# Altium PCB PID.PcbDoc
Units mil, origin at the board's own origin, x right, y up, seen from the top; angles counter-clockwise.
Board outline 2435 x 1955 mil, 2 copper layers (Top Layer, Bottom Layer); 19 components, 15 nets, 54 pads, 0 vias.
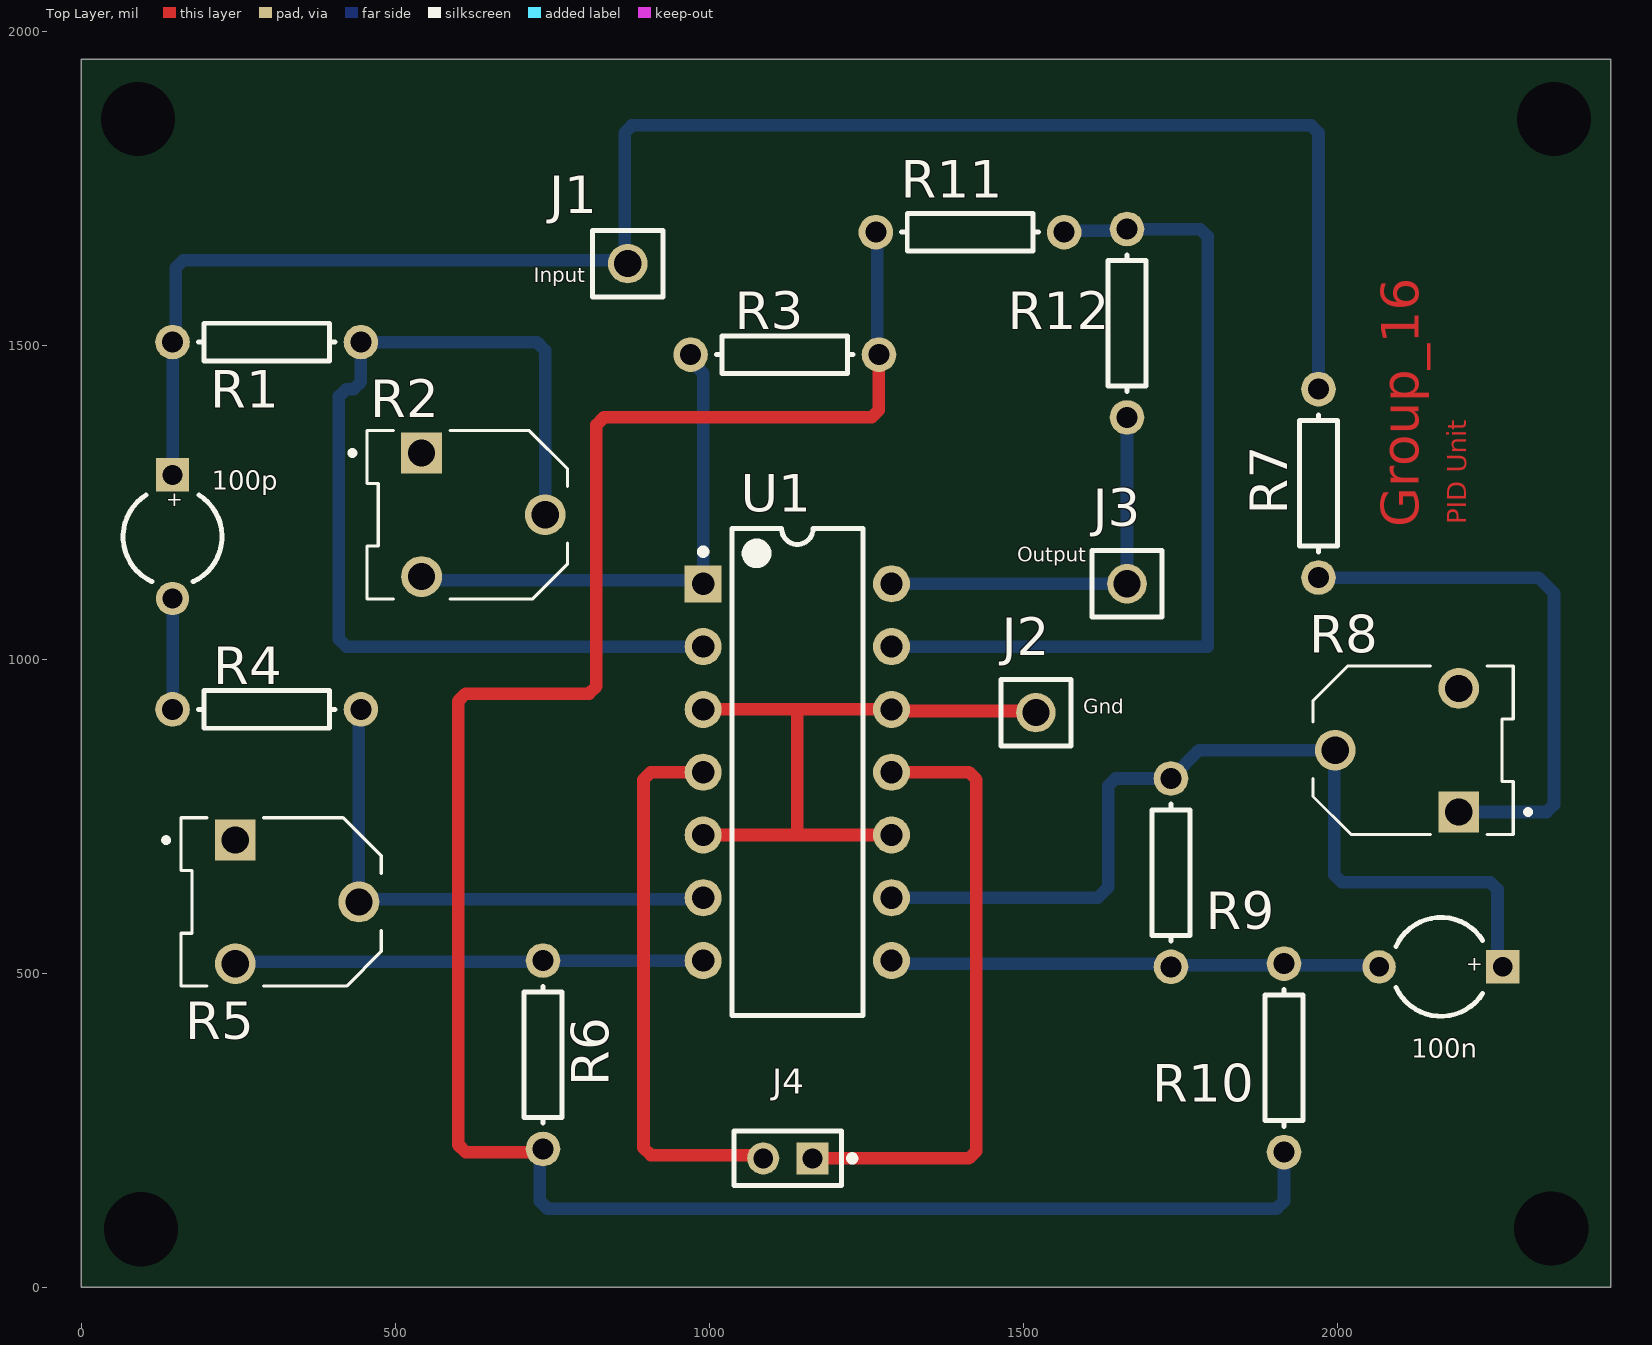
[diagram p0: Top Layer view]
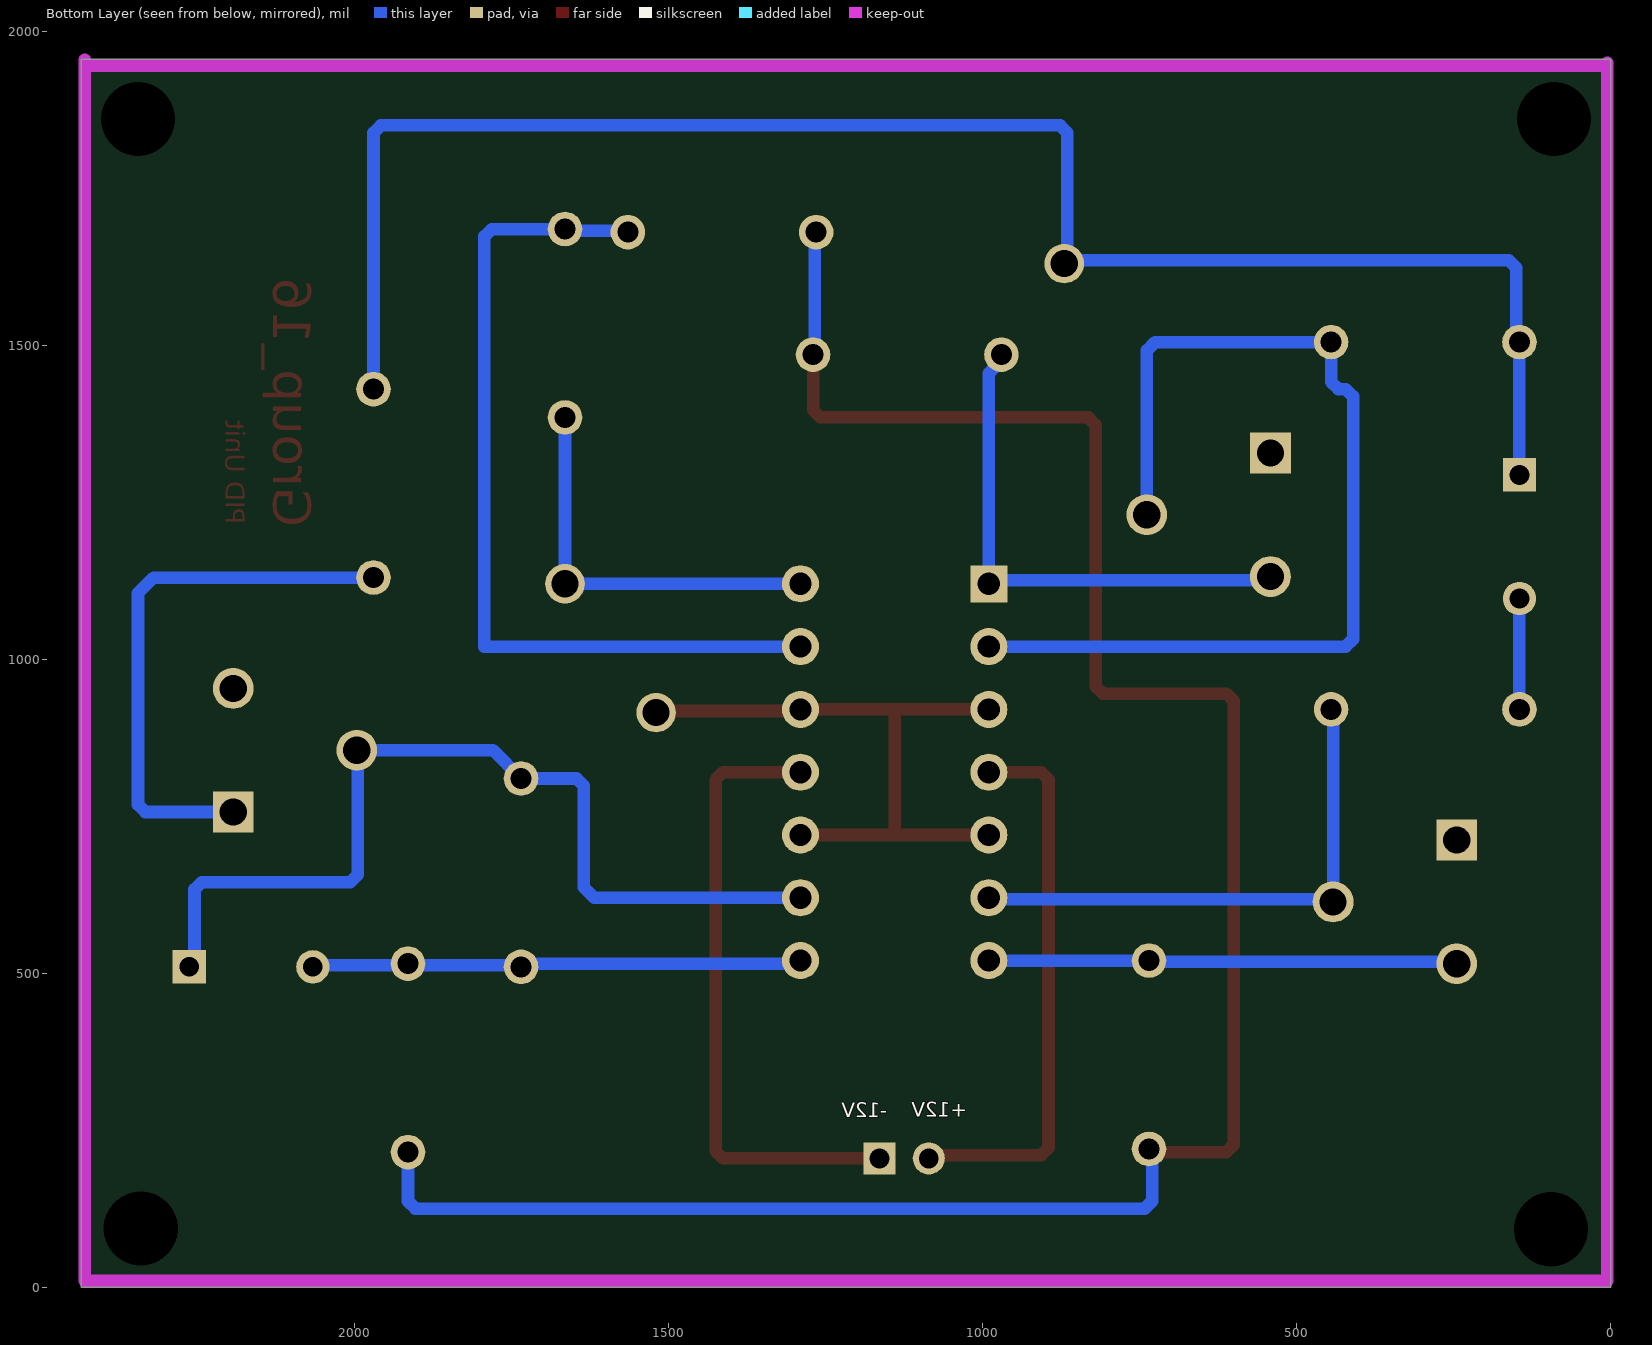
[diagram p1: Bottom Layer view, seen from below]

## Layer stack, top to bottom
Top Solder: solder mask 0.4, Solder Resist, Dk 3.5
Top Layer: signal copper 1.4
Dielectric 1: dielectric 12.6, FR-4, Dk 4.8
Bottom Layer: signal copper 1.4
Bottom Solder: solder mask 0.4, Solder Resist, Dk 3.5

## Board outline
0,0 2435,0 2435,1955 0,1955

## Design rules (kind name [scope] priority, off if disabled: settings)
Clearance [All] p1: gap=10 ignorepadtopadclearanceinfootprint=FALSE except(0: Arc-Hole Track-Hole SMDPad-Hole THPad-Hole Via-Hole Fill-Hole Poly-Hole Region-Hole Text-Hole)
PolygonConnect [All] p1: connectstyle=Relief reliefconductorwidth=10 reliefentries=4 polygonreliefangle="90 Angle" airgapwidth=10
RoutingVias [All] p1: holewidth=28 width=50 viastyle="Through Hole" minholewidth=28 minwidth=50 maxholewidth=28 maxwidth=50
SolderMaskExpansion [All] p1: expansion=4 istentingtop=FALSE
Width [All] p1: maxlimit=20 minlimit=20 preferedwidth=20 minimp=50.000000 maximp=50.000000 favimp=50.000000
30 further rules are at their usual default settings.

## Components (designator, comment, footprint, x,y, rotation, side; value= is the part's Value field where it differs from the comment)
100n "Cap2" CAPR5-4X5 2165,510 r180 top value=100nF (schematic designator C2)
100p "Cap2" CAPR5-4X5 145,1195 r270 top value=100pF (schematic designator C1)
J1 "61300111121" 61300111121 870,1630 r0 top
J2 "61300111121" 61300111121 1520,915 r0 top
J3 "61300111121" 61300111121 1665,1120 r0 top
J4 "M22-2010205" FP-M22-2010205-MFG 1125,205 r180 top
R1 "Res1" AXIAL-0.3 295,1505 r0 top value=1K
R2 "3306F-1-105" TRIM_3306F-1-105 640,1230 r0 top
R3 "Res1" AXIAL-0.3 1120,1485 r0 top value=1K
R4 "Res1" AXIAL-0.3 295,920 r0 top value=1K
R5 "3306F-1-105" TRIM_3306F-1-105 343.43,613.43 r0 top
R6 "Res1" AXIAL-0.3 735,370 r270 top value=1K
R7 "Res1" AXIAL-0.3 1970,1280 r270 top value=1K
R8 "3306F-1-105" TRIM_3306F-1-105 2095,855 r180 top
R9 "Res1" AXIAL-0.3 1735,660 r270 top value=50K
R10 "Res1" AXIAL-0.3 1915,365 r270 top value=1K
R11 "Res1" AXIAL-0.3 1415,1680 r0 top value=1K
R12 "Res1" AXIAL-0.3 1665,1535 r270 top value=1K
U1 "LM324N" N0014A 1140,820 r0 top

## Footprints (in the part's own frame and the unit in brackets; to place one, negate y for a bottom-side part, rotate by r counter-clockwise, add the part's x,y. Pads: shape width x height; smd on the part's side, far side on the other; paste and mask are expansions set on the pad)
61300111121 [mm] "Pin Header, pitch 2.54 mm, THT, Vertical, single row, 1p"
  round 1.6 hole 1.1: 1(0,0)
  silkscreen extent -1.42,-1.35 1.42,1.35, body extent -1.27,-1.27 1.27,1.27, height 8.57
AXIAL-0.3 [mm] "Axial Device, Thru-Hole; 2 Leads; 0.3 in Pin Spacing"
  round 1.4 hole 0.85: 1(-3.81,0) 2(3.81,0)
  silkscreen extent -2.77,-0.76 2.77,0.76
CAPR5-4X5 [mm] "Capacitor; 2 Leads"
  rect 1.35x1.35 hole 0.8: 1(-2.5,0)
  round 1.35 hole 0.8: 2(2.5,0)
  silkscreen extent -1.69,-2 1.82,2
FP-M22-2010205-MFG [mm]
  rect 1.3x1.3 hole 0.8 paste-1000 mask+0: 1(-1,0)
  round 1.3 hole 0.8 paste-1000 mask+0: 2(1,0)
  silkscreen extent -2.73,-1.1 2.17,1.1, body extent -2.27,-1.2 2.27,1.2, height 0.25
N0014A [mm] "DIP, 14-Leads, Body 19.7x6.6mm, Pitch 2.54mm"
  rect 1.5x1.5 hole 0.9: 1(-3.81,7.62)
  round 1.5 hole 0.9: 2(-3.81,5.08) 3(-3.81,2.54) 4(-3.81,0) 5(-3.81,-2.54) 6(-3.81,-5.08) 7(-3.81,-7.62) 8(3.81,-7.62) 9(3.81,-5.08) 10(3.81,-2.54) 11(3.81,0) 12(3.81,2.54) 13(3.81,5.08) 14(3.81,7.62)
  silkscreen extent -3.93,-9.85 2.65,9.85, body extent -3.95,-9.85 3.95,9.85, height 5.08
TRIM_3306F-1-105 [mm]
  rect 1.65x1.65 hole 1.1: 1(-2.5,2.5)
  round 1.65 hole 1.1: 2(2.5,0) 3(-2.5,-2.5)
  silkscreen extent -5.4,-3.4 3.4,3.4, body extent -4.7,-3.4 3.4,3.4, height 8.38

## Part data
100n 100p: "Capacitor", PackageDescription="Capacitor; 2 Leads", PackageReference=CAPR5-4X5, Published=23-Sep-2002, Publisher="Altium Limited"
J1 J2 J3: library part CMP-1502-01058-1, "THT Vertical Pin Header WR-PHD, Pitch 2.54 mm, Single Row, 1 pins", Contact Resistance=20mOhm, Manufacturer="Wurth Elektronik", Operating Temperature=-40to105degC, Rated Current=3A, Withstanding Voltage=500VAC, Working Voltage=250VAC, Datasheet URL=https://katalog.we-online.de/em/datasheet/6130xx11121.pdf, Gender=Male, Manufacturer URL=http://www.we-online.de, Mounting Technology=THT, Orientation=Vertical, Package Reference=61300111121, Packaging=Bag, Part Number=61300111121, Pin Number=1, Pitch=2.54mm, Publisher=WurthElektronik, Row Number=Single
J4: library part CMP-15831-000101-1, "CONN HEADER VERT 2POS 2MM", Case/Package=SIL, Color=Black, Contact Resistance=20mR, Current Rating=1A, Flammability Rating="UL94 V-0", Insulation Resistance=10GR, Max Operating Temperature=105°C, Min Operating Temperature=-55°C, Package Quantity=1000, Voltage Rating=650V, Voltage Rating (AC)=250V, Connector Type="Male Pin", Contact Finish - Mating=GOLD, Contact Material=Bronze, Contact Mating Length=0.138inch, Contact Plating=Gold, Contact Shape=Square, Contact Type="Male Pin", Depth=2mm, Fastening Type=Pull, Gender=Male, Housing Color=Black, Housing Material=Nylon, Insulation Color=Black, Insulation Material=Nylon, Length=4mm, Mated Stacking Heights=8.6mm, Max Current Rating=1A, Mount="Through Hole", Number of Contacts=2, Number of Positions=2, Number of Rows=1, Orientation=Straight, Packaging=Bulk, Pitch=2mm, Radiation Hardening=No, Reach SVHC Compliant=Yes, Series=M22, Termination=Solder
R1 R3 R4 R6 R7 R9 R10 R11 R12: "Resistor", LatestRevisionDate=17-Jul-2002, LatestRevisionNote="Re-released for DXP Platform.", PackageDescription="Axial Device, Thru-Hole; 2 Leads; 0.3 in Pin Spacing", PackageReference=AXIAL-0.3, Published=8-Jun-2000, Publisher="Altium Limited"
R2 R5 R8: "1 MOhms 0.2W, 1/5W PC Pins Through Hole Trimmer Potentiometer Cermet 1 Turn Top Adjustment", Package="3306F Bourns", Availability=Good, Check_prices=https://www.snapeda.com/parts/3306F-1-105/Bourns%20-%20J.W.%20Miller/view-part/862876/?ref=eda, MF=Bourns, MP=3306F-1-105, Price=None, Purchase-URL=https://pricing.snapeda.com/search/part/3306F-1-105/?ref=eda, SnapEDA_Link=https://www.snapeda.com/parts/3306F-1-105/Bourns%20-%20J.W.%20Miller/view-part/862876/?ref=snap
U1: library part CMP-0055-00082-3, "Low Power Quad Operational Amplifier, 14-pin MDIP", Manufacturer="Texas Instruments", Package Reference=N0014A, PackageTopMarking=NSUZXYYTTE#*LM324N, PowerWise=N, Code_JEDEC=MS-001-AA, ComponentLink1Description="Datasheet URL", ComponentLink1URL=http://www.ti.com/general/docs/lit/getliterature.tsp?genericPartNumber=LM324&fileType=pdf, CompType=Amplifiers, PackageDescription="MDIP, .750 x .250 x.130in, 14 Lead, .100in Pitch", PinCount=14, RoHS=N

## Free pads (board coordinates)
  round 60 hole 118.11: 6(90,1860) 6(94.97,92.07) 6(2340.57,93.56) 6(2345,1860)

## Nets (pads, with @x,y where several pads share a name; then routed paths per layer and width w, separated by ;. In a path a pad name is that pad's centre, name@x,y a point inside that pad or via, vN(x,y) a via of type N, cw(c..) or ccw(c..) an arc to the next point about the centre after c; other vN are vias at no path point)
+12: J4.2 U1.4 | length 884
  Top Layer w20: U1.4 906.72,820 895,808.28 895,221.72 906.72,210 1080.63,210 J4.2
-12: J4.1 U1.11 | length 996.9
  Top Layer w20: J4.1 1413.28,205 1425,216.72 1425,808.28 1413.28,820 U1.11
GND: J2.1 U1.3 U1.5 U1.10 U1.12 | length 1036.5
  Top Layer w20: U1.5 U1.5@1005,720 ; U1.3 1140,920 ; U1.5@1005,724.43 U1.5@1005,720 ; U1.10 1140,720 ; J2.1 1517.5,917.5 1292.5,917.5 U1.12 1140,920 ; U1.5@1005,720 1140,720 ; 1140,720 1140,920
NetC1_1: 100p.1 J1.1 R1.1 R7.1 | length 2785.1
  Bottom Layer w20: 100p.1 R1.1 150,1510 150,1623.28 161.72,1635 J1.1@865,1635 ; J1.1 J1.1@865,1635 ; R7.1 1970,1838.28 1958.28,1850 876.72,1850 865,1838.28 J1.1@865,1635
NetC1_2: 100p.2 R4.1 | length 176.6
  Bottom Layer w20: R4.1 100p.2
NetC2_1: 100n.1 R8.2 R9.1 U1.9 | length 1494
  Bottom Layer w20: U1.9 1618.28,620 1635,636.72 1635,798.28 1646.72,810 R9.1 1780,855 R8.2 1995,853.43 1995,656.72 2006.72,645 2243.28,645 2255,633.28 2255,518.42 100n.1
NetC2_2: 100n.2 R9.2 R10.1 U1.8 | length 784.9
  Bottom Layer w20: U1.8 1295,515 1730,515 R9.2 1737.5,512.5 1912.5,512.5 R10.1 1917.5,512.5 2064.07,512.5 100n.2
NetJ3_1: J3.1 R12.2 U1.14 | length 640
  Bottom Layer w20: U1.14 J3.1 R12.2
NetR1_2: R1.2 R2.2 U1.2 | length 1640
  Bottom Layer w20: R2.2 738.43,1491.57 725,1505 R1.2 445,1441.72 433.28,1430 421.72,1430 410,1418.28 410,1031.72 421.72,1020 U1.2
NetR2_3: R2.3 R3.1 U1.1 | length 826.5
  Bottom Layer w20: R2.3 547.36,1125.79 984.21,1125.79 U1.1 990,1455.5 970,1475.5 R3.1
NetR3_2: R3.2 R6.2 R10.2 R11.1 | length 3598.2
  Top Layer w20: R6.2 730,215 611.72,215 600,226.72 600,933.28 611.72,945 808.28,945 820,956.72 820,1373.28 831.72,1385 1258.28,1385 1270,1396.72 R3.2
  Bottom Layer w20: R6.2 730,215 730,136.72 741.72,125 1903.28,125 1915,136.72 R10.2 ; R11.1 1267.5,1677.5 1267.5,1487.5 R3.2
NetR4_2: R4.2 R5.2 U1.6 | length 857.8
  Bottom Layer w20: R5.2@438.43,615 R5.2@440.93,617.5 ; R4.2 441.71,916.71 441.71,618.29 R5.2@440.93,617.5 ; U1.6 987.5,617.5 R5.2@440.93,617.5
NetR5_3: R5.3 R6.1 U1.7 | length 749.8
  Bottom Layer w20: R5.3@241.57,516.57 243.29,518.29 733.29,518.29 R6.1 U1.7
NetR7_2: R7.2 R8.1 | length 887.8
  Bottom Layer w20: R7.2 2320,1130 2345,1105 2345,768.29 2333.28,756.57 R8.1 R8.1@2200,750
NetR11_2: R11.2 R12.1 U1.13 | length 1391.8
  Bottom Layer w20: U1.13 1793.28,1020 1793.28,1673.28 1781.57,1685 R12.1 1662.5,1682.5 1567.5,1682.5 R11.2
pads on no net: R2.1 R5.1 R8.3

## Keep-outs
Bottom Layer:
  lines w19.68: 2420,1945 10,1945 5,1950 5,10 60,10 2430,10 2430,1955

## Other copper
Top Layer:
  text "PID Unit" at 2205,1215 h30 r90
  text "Group_16" at 2130.01,1210 h60 r90
Multi-Layer:
  text "P" at 665,1385 h60
  text "I" at 2190,1010 h60
  text "D" at 390,395 h60

## Silkscreen, mask and mechanical layers (free items; w line width, h text height)
Top Overlay:
  text "Input" at 720,1592.1 h40
  text "+" at 135,1235.86 h40
  text "Output" at 1490,1147.1 h40
  text "Gnd" at 1595,905.44 h40
  text "+" at 2205,495.86 h40
Bottom Overlay:
  text "+12V" at 1024.62,263.09 h40
  text "-12V" at 1151.45,262.59 h40